# EAGLE board TX433MHz (EAGLE 6.5.0)
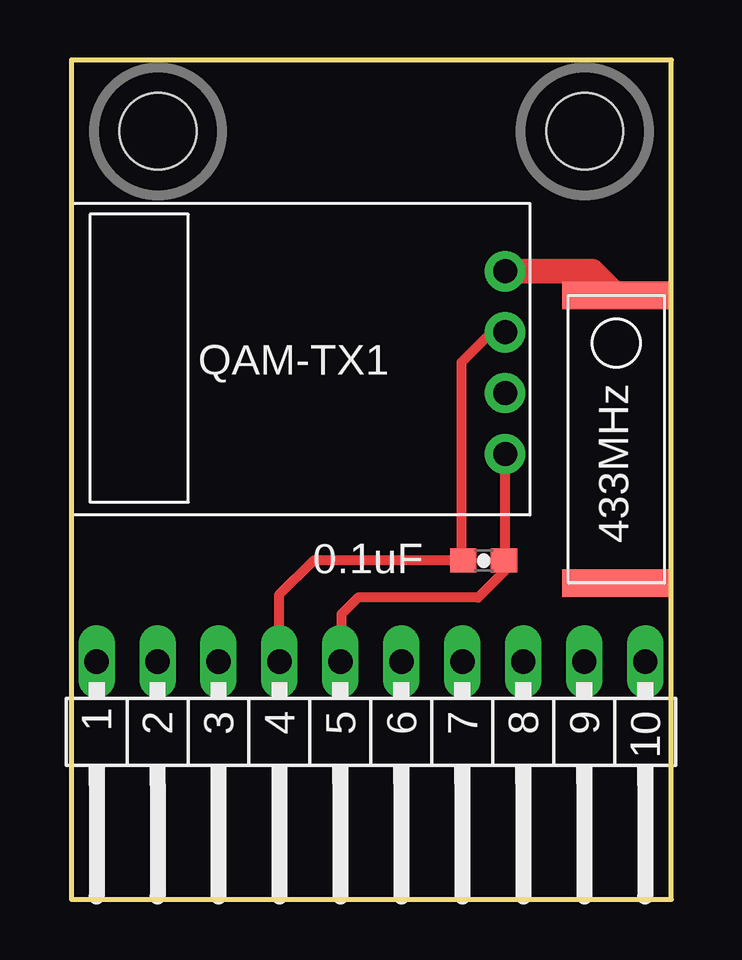
[diagram p0: board, top side]
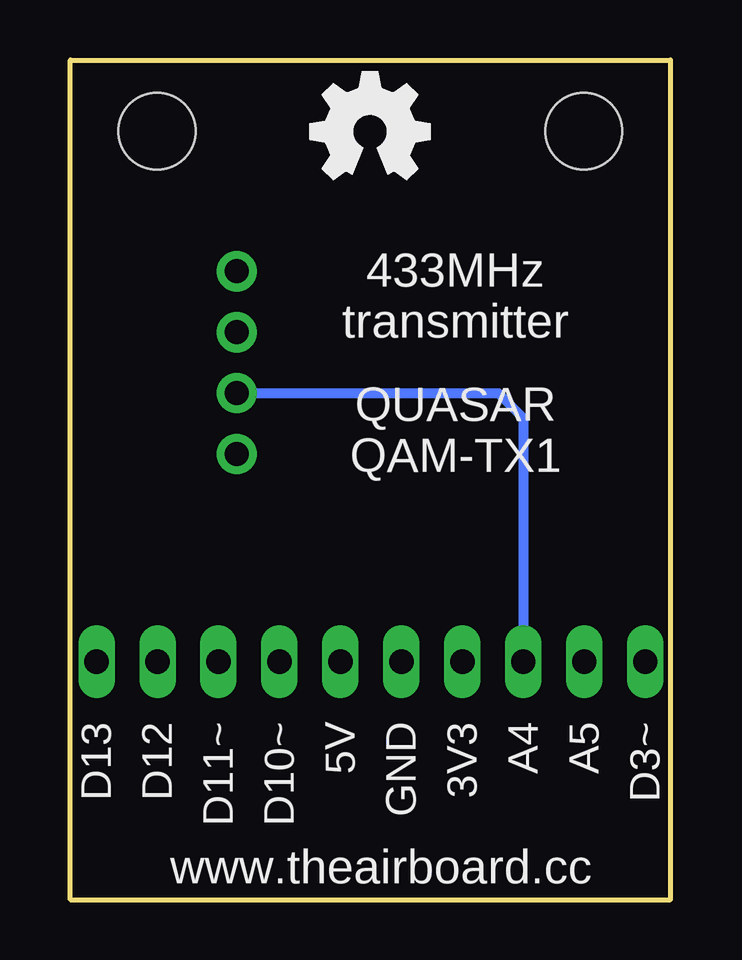
[diagram p1: board, bottom side, seen from below]

Size 25 x 35 mm. Coordinates in mm from the lower left corner, seen from the top.
Copper layers (1*16): Top 0.035mm / dielectric 1.5mm / Bottom 0.035mm
Design rules "default": minimum track width 10mil, minimum drill 24mil, track to track 8mil, track to pad 8mil, pad to pad 8mil, via to via 8mil, smd to smd 8mil, copper to edge 40mil, drill to drill 8mil, minimum pad ring 10mil, minimum via ring 8mil, stop-mask expansion 4mil, vias tented up to drill 0mil, thermal gap 10mil

## Footprints (pad centres in the part's own frame; a part is rotated, then mirrored left to right if it is on the bottom)
433MHZANTENNA = smd 1.15 x 4.5: 1 0,0; 2 -12,0
0603-CAP = smd 1.1 x 1: 1 -0.85,0; 2 0.85,0
SIL-1X10 = drill 1.016 long: 1 11.43,0; 2 8.89,0; 3 6.35,0; 4 3.81,0; 5 1.27,0; 6 -1.27,0; 7 -3.81,0; 8 -6.35,0; 9 -8.89,0; 10 -11.43,0
QAM-TX1 = drill 1 pad 1.676: 1 -2.3,0; 2 -2.3,2.54; 3 -2.3,5.08; 4 -2.3,7.62
LAYOUT35X25 = hole 3.2: 21.61,32.275; 3.83,32.275

## Placement (x,y rotation side)
ANT1  433MHz  [433MHZANTENNA]  22.71,25.19 90 top
C1  0.1uF  [0603-CAP]  17.18,14.13 0 top
FRAME1  SCH_FRAME  [BOARD_FRAME]  -103.09,-75.18 0 top  (outside the outline)
JP1  SIL  [SIL-1X10]  12.48,9.91 180 top
U1  QAM-TX1  [QAM-TX1]  20.37,18.57 0 top
U$1  [LAYOUT35X25]  -0.22,-0.25 0 top

## Library data of the parts
ANT1 = theairboard; MANUFACTURER: YAGEO; OC_FARNELL: 1282674; OC_NEWARK: 25M3718; PART_NUMBER: CAN4311129200431K
C1 = SparkFun
FRAME1 U$1 = theairboard
JP1 = theairboard; MANUFACTURER: FCI; OC_FARNELL: 1097958; OC_NEWARK: 93K5133; PART_NUMBER: 77315-818-36LF
U1 = theairboard; MANUFACTURER: QUASAR; OC_FARNELL: 1304024; OC_NEWARK: 24M6596; PART_NUMBER: QAM-TX1

## Nets
GND: C1.2 JP1.5 U1.1
N$2: ANT1.1 U1.4
N$5: JP1.3 U1.2
VCC: C1.1 JP1.4 U1.3

## Tracks (layer width: path | path; a pad name or v marks a point on that pad's centre or on a via)
GND
  Top 0.406: U1.1 18.07,14.13 C1.2 18.03,13.67 16.95,12.59 11.95,12.59 11.25,11.89 11.25,9.95 JP1.5
N$2
  Top 1.016: ANT1.1 21.71,26.19 U1.4
N$5
  Bottom 0.406: U1.2 7.17,21.11 6.13,20.07 JP1.3
VCC
  Top 0.406: U1.3 17.51,23.65 16.25,22.39 16.25,14.21 C1.1 10.09,14.13 8.65,12.69 8.65,9.93 JP1.4

## Text on the board
bNames: 433MHz / transmitter | QUASAR / QAM-TX1